# Allegro board TIDC-CC2650-CC2592-EMK_V1.1.0.brd
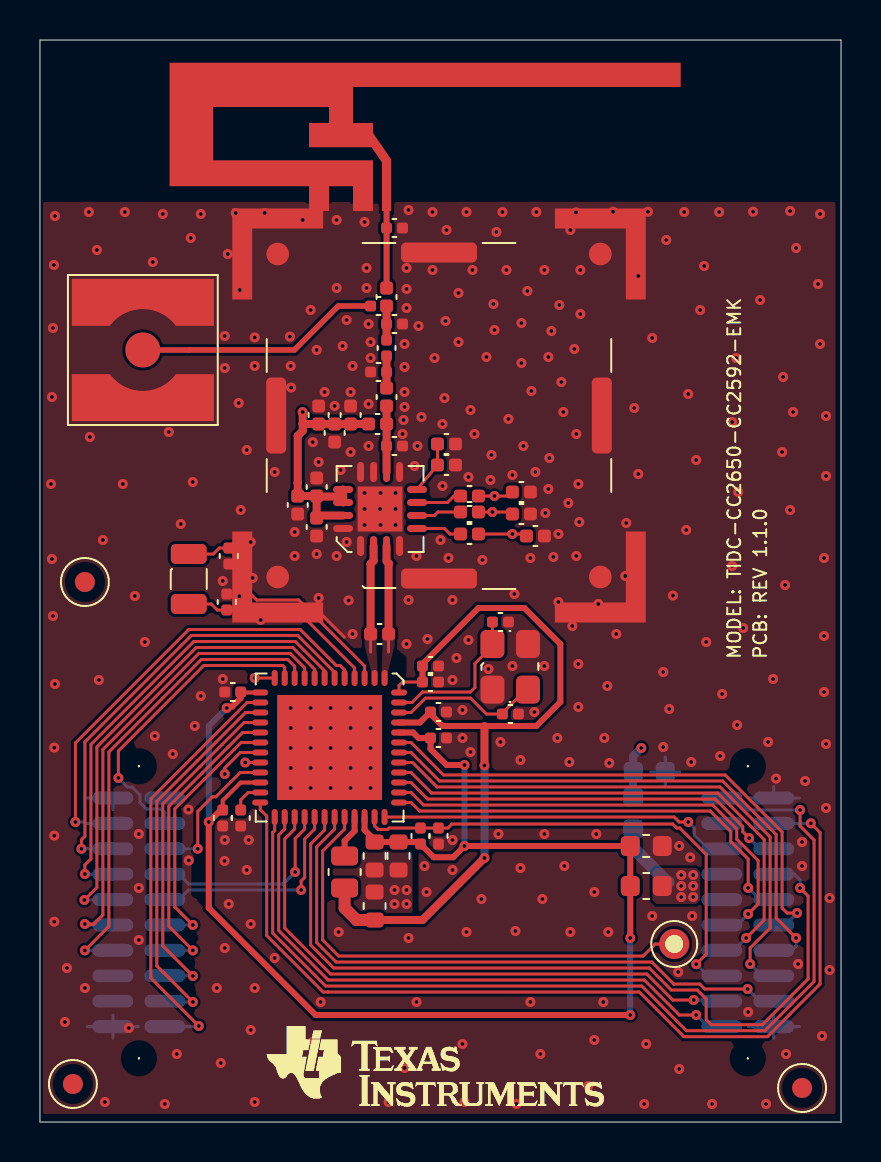
[diagram p0: board, top side]
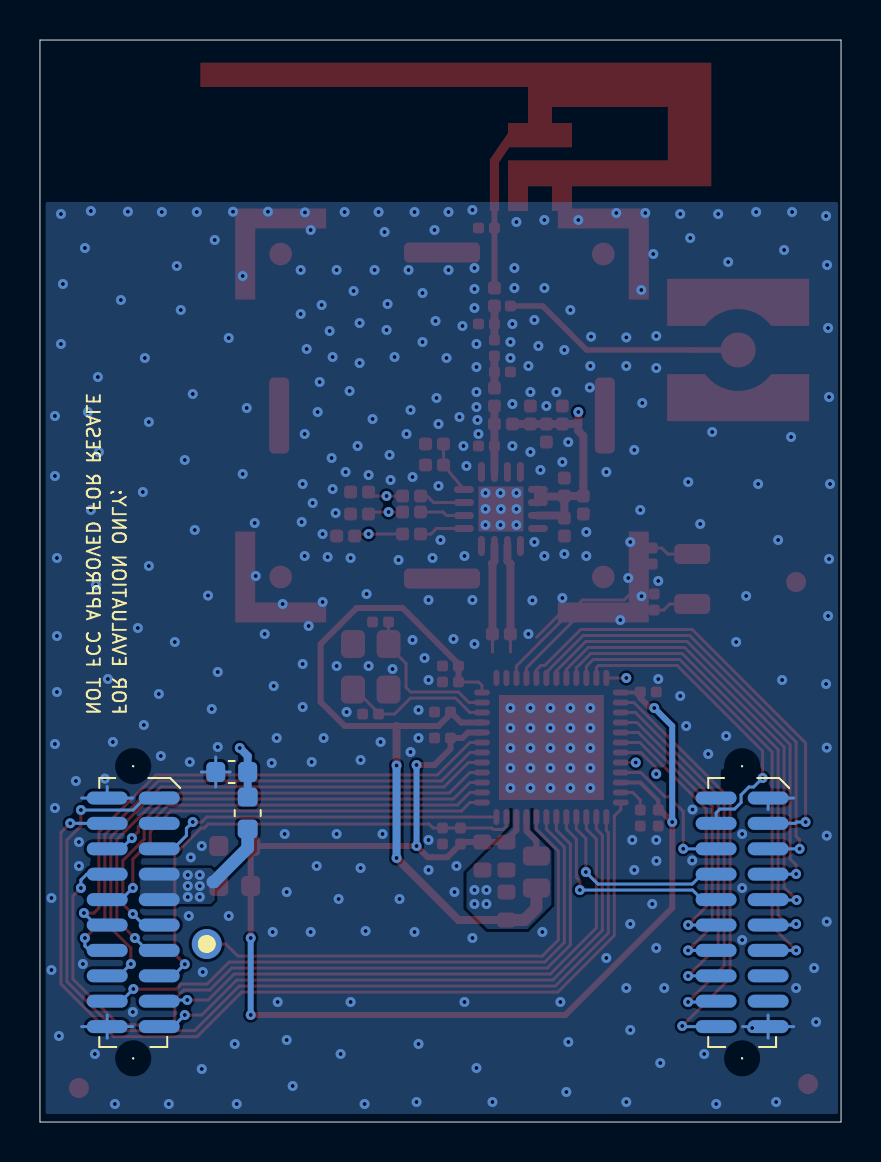
[diagram p1: board, bottom side, seen from below]

Outline 40.1 x 54.1 mm; copper layers: TOP, L2, L3, BOTTOM. Coordinates in mm from the lower left corner of the outline.
Outline path: 0,54.1 0,0 40.1,0 40.1,54.1 0,54.1

## Placement (name value [footprint] x y rotation side)
A1  2.4GHz  [ANTENNA_DN007N]  17.35 45.8 0 top
C1  10uF  [CAPC1608X90N#2]  16.75 10.1 90 top
C2  DNM  [CAPC1608X90N]  29.55 13.8 0 top
C3  100nF  [CAPC1005X60N]  10.05 21.5 180 top
C4  100nF  [CAPC1005X60N]  9.15 15.6 270 top
C5  100nF  [CAPC1005X60N]  19.55 19.2 0 top
C6  10uF  [CAPC1608X90N#2]  16.75 14 270 top
C7  100nF  [CAPC1608X90N#2]  17.95 14 270 top
C8  100nF  [CAPC1005X60N]  19.15 22 0 top
C9  100nF  [CAPC1005X60N]  19.55 20.5 0 top
C10  DNM_0402  [CAPC1005X60N]  19.15 22.8 0 top
C11  2.2uF  [CAPC1608X90N]  29.7 17.5 0 bottom
C12  2.2pF  [CAPC1005X60N]  17.35 33.8 0 top
C13  2.2pF  [CAPC1005X60N]  17.35 37.5 180 top
C14  1pF  [CAPC1005X60N]  17.35 39.9 0 top
C15  DNM_0402  [CAPC1005X60N]  17.35 44.7 0 top
C16  1nF  [CAPC1005X60N#2]  13.85 31.3 90 top
C17  12pF  [CAPC1005X60N]  9.45 28.7 270 top
C18  12pF  [CAPC1005X60N]  9.35 25.6 90 top
C19  12pF  [CAPC1005X60N#2]  13.85 30.2 270 top
C20  100nF  [CAPC1005X60N]  19.95 14.7 270 top
C21  1uF  [CAPC1005X60N#2]  13.95 34.9 90 top
C22  DNM_0402  [CAPC1005X60N]  23.15 20.4 0 top
C23  DNM_0402  [CAPC1005X60N]  22.65 25 0 top
C24  DNM_0402  [CAPC1005X60N]  16.55 40.8 0 top
C25  12pF  [CAPC1005X60N#2]  15.55 34.9 90 top
C26  1nF  [CAPC1005X60N#2]  14.75 34.9 270 top
C27  18pF  [CAPC1005X60N#2]  17.35 40.8 90 top
C28  1uF  [CAPC1005X60N]  10.05 15.6 270 top
C29  DNM_0402  [CAPC1005X60N#2]  19.9 33.9 0 top
C32  DNM_0402  [CAPC1005X60N#2]  12.9 31.3 270 top
C36  1.5pF  [CAPC1005X60N#2]  24.55 31.5 180 top
C37  1.5pF  [CAPC1005X60N#2]  24.55 30.4 180 top
C38  1.5pF  [CAPC1005X60N#2]  25.25 29.3 180 top
DIO22  TP_0.9mm_PTH  [TP150_90H]  31.75 8.9 0 top
FIDU1  FIDU_1MM  [FID100X115B]  1.65 1.9 0 top
FIDU2  FIDU_1MM  [FID100X115B]  38.15 1.7 0 top
FIDU3  FIDU_1MM  [FID100X115B]  2.25 27 0 top
FL1  BLM18HE152SN1  [FIL_BLM18HE152SN1DN]  29.55 11.8 0 top
FL2  BLM18HE152SN1  [FIL_BLM18HE152SN1DN]  29.7 16.25 270 bottom
J1  142-0711-201  [CINCH_1420711201_A2N]  5.15 38.6 90 top
L1  10uH  [INDC2012X150N]  15.25 13.3 270 top
L2  4.7nH  [INDC1005X60N]  16.45 34.9 0 top
L3  TBD  [INDC1005X60N]  17.45 24.4 180 top
L4  1nH  [INDC1005X60N]  17.35 35.8 90 top
L13  2nH  [INDC1005X60N#2]  17.35 38.3 90 top
NOREF  -  []  0 54.1 0 top
NOREF#2  -  []  40.1 0 90 top
P1  SFM-110-02-S-D-A-K-TR  [SAMTEC_SFM11002AN]  3.65 16.2 0 bottom
P2  SFM-110-02-S-D-A-K-TR  [SAMTEC_SFM11002AN]  34.13 16.2 0 bottom
R1  100k  [RESC1005X40N#2]  19.05 14.7 270 top
R2  3.9k  [RESC1005X40N]  20.8 32.85 180 top
R13  10k  [RESC1005X40N]  21.05 29.4 0 top
R14  10k  [RESC1005X40N]  21.05 30.5 0 top
R15  10k  [RESC1005X40N]  21.05 31.3 0 top
SC2  BMIS-202-F  [MECH_BMIS202FN]  11.9 27.25 0 top
U1  CC2650F128RGZ  [QFNFC50P700X700X80-49CN]  17.25 22.2 180 top
U2  CC2592  [QFNFC65P400X400X100-17AN]  16.05 28.8 0 top
UNK#REFDES  -  []  12.35 4.8 0 top
Y1  32.768kHz  [XTAL_FC-135N]  7.45 28.4 270 top
Y2  24MHz  [OSCCC250X320X60-4N]  22.65 23.9 270 top

## Library data of the parts
A1 = ANTENNA_DN007
C1 C2 C6 C7 C11 = CAPACITOR: alternate symbols: (CAPC1608X90L,CAPC1608X90M)
C3-C5 C8-C10 C12-C15 C17 C18 C20 C22-C24 C28 = CAPACITOR: alternate symbols: (CAPC1005X60L,CAPC1005X60M)
C16 C19 C21 C25-C27 C29 C32 C36-C38 = CAPACITOR: User Part Number: #PN; alternate symbols: (CAPC1005X60L,CAPC1005X60M)
DIO22 = TEST_POINT
FIDU1-FIDU3 = FIDMARK
FL1 FL2 = FILTER_2PIN: alternate symbols: (FIL_BLM18HE152SN1DL,FIL_BLM18HE152SN1DM)
J1 = CONN_COAX_1_J_2MH_V1: User Part Number: #PN; alternate symbols: (CINCH_1420711201_A2L,CINCH_1420711201_A2M)
L1 = INDUCTOR: alternate symbols: (INDC2012X150L,INDC2012X150M)
L2 L4 L13 = INDUCTOR: alternate symbols: (INDC1005X60L,INDC1005X60M)
L3 = INDUCTOR: alternate symbols: (INDC1005X60M,INDC1005X60L)
P1 P2 = CONN_HEADER_2X10_P_S: alternate symbols: (SAMTEC_SFM11002AL,SAMTEC_SFM11002AM)
R1 R2 R13-R15 = RESISTOR: alternate symbols: (RESC1005X40L,RESC1005X40M)
SC2 = SHIELD_COVER_BMIS-202: User Part Number: #PN
U1 = IC_RF_CC26XX_QFN48_V2: alternate symbols: (QFNFC50P700X700X80-49CL,QFNFC50P700X700X80-49CM)
U2 = IC_RF_CC2592_QFN16_V1: alternate symbols: (QFNFC65P400X400X100-17AL,QFNFC65P400X400X100-17AM)
Y1 = CRYSTAL: alternate symbols: (XTAL_FC-135L,XTAL_FC-135M)
Y2 = XTAL_4PIN_S: alternate symbols: (OSCCC250X320X60-4L,OSCCC250X320X60-4M)

## Footprints (pads in the part's own frame, mm; a bottom-side part is the same pattern mirrored in y, then rotated)
ANTENNA_DN007N
  rect 0.46x0.5 smd: 1(0,0)
  rect 1x0.5 smd: 2(-1.18,0) 3(-3.38,0)
CAPC1005X60N
  custom 0.55x0.54 smd: 1(0,0) 2(0.8,0)
CAPC1005X60N#2
  custom 0.65x0.64 smd: 1(0,0) 2(0.9,0)
CAPC1608X90N
  custom 0.95x1 smd: 1(0,0) 2(1.6,0)
CAPC1608X90N#2
  custom 0.75x0.9 smd: 1(0,0) 2(1.4,0)
CINCH_1420711201_A2N
  round 1.75 smd: 1(0,0)
  custom 2.35x7.11 smd: M1(-2.38,0) M2(2.38,0)
FID100X115B
  round 1 smd: 1(0,0)
FIL_BLM18HE152SN1DN
  custom 0.95x1 smd: 1(0,0) 2(1.6,0)
INDC1005X60N
  custom 0.65x0.64 smd: 1(0,0) 2(0.9,0)
INDC1005X60N#2
  custom 0.55x0.54 smd: 1(0,0) 2(0.8,0)
INDC2012X150N
  custom 0.95x1.352 smd: 1(0,0) 2(1.6,0)
MECH_BMIS202FN
  custom 4.55x4.55 smd: 1(0,0) 3(16.15,0) 5(16.15,16.15) 7(0,16.15)
  custom 3.8x1 smd: 2(8.075,-0.075) 6(8.075,16.225)
  custom 1x3.8 smd: 4(16.225,8.075) 8(-0.075,8.075)
OSCCC250X320X60-4N
  custom 1.4x1.2 smd: 1(0,0) 2(2.28,0) 3(2.28,1.78) 4(0,1.78)
QFNFC50P700X700X80-49CN
  oval 0.3x0.8 smd: 1(0,0) 2(0.5,0) 3(1,0) 4(1.5,0) 5(2,0) 6(2.5,0) 7(3,0) 8(3.5,0) 9(4,0) 10(4.5,0) 11(5,0) 12(5.5,0) 25(5.5,6.95) 26(5,6.95) 27(4.5,6.95) 28(4,6.95) 29(3.5,6.95) 30(3,6.95) 31(2.5,6.95) 32(2,6.95) 33(1.5,6.95) 34(1,6.95) 35(0.5,6.95) 36(0,6.95)
  oval 0.8x0.3 smd: 13(6.225,0.725) 14(6.225,1.225) 15(6.225,1.725) 16(6.225,2.225) 17(6.225,2.725) 18(6.225,3.225) 19(6.225,3.725) 20(6.225,4.225) 21(6.225,4.725) 22(6.225,5.225) 23(6.225,5.725) 24(6.225,6.225) 37(-0.725,6.225) 38(-0.725,5.725) 39(-0.725,5.225) 40(-0.725,4.725) 41(-0.725,4.225) 42(-0.725,3.725) 43(-0.725,3.225) 44(-0.725,2.725) 45(-0.725,2.225) 46(-0.725,1.725) 47(-0.725,1.225) 48(-0.725,0.725)
  rect 5.25x5.25 smd: 49(2.75,3.475)
QFNFC65P400X400X100-17AN
  oval 0.35x1 smd: 1(0,0) 2(0.65,0) 3(1.3,0) 4(1.95,0) 9(1.95,3.7) 10(1.3,3.7) 11(0.65,3.7) 12(0,3.7)
  oval 1x0.35 smd: 5(2.825,0.875) 6(2.825,1.525) 7(2.825,2.175) 8(2.825,2.825) 13(-0.875,2.825) 14(-0.875,2.175) 15(-0.875,1.525) 16(-0.875,0.875)
  rect 2.25x2.25 smd: 17(0.975,1.85)
RESC1005X40N
  custom 0.65x0.64 smd: 1(0,0) 2(0.9,0)
RESC1005X40N#2
  custom 0.55x0.54 smd: 1(0,0) 2(0.8,0)
SAMTEC_SFM11002AN
  round 0.1 hole 1.5 unplated: (1.302,-1.588) (1.302,13.017)
  oval 2.05x0.65 smd: 1(0,0) 2(2.604,0) 3(0,1.27) 4(2.604,1.27) 5(0,2.54) 6(2.604,2.54) 7(0,3.81) 8(2.604,3.81) 9(0,5.08) 10(2.604,5.08) 11(0,6.35) 12(2.604,6.35) 13(0,7.62) 14(2.604,7.62) 15(0,8.89) 16(2.604,8.89) 17(0,10.16) 18(2.604,10.16) 19(0,11.43) 20(2.604,11.43)
TP150_90H
  round 1.5 hole 0.9: 1(0,0)
XTAL_FC-135N
  custom 1x1.8 smd: 1(0,0) 2(2.5,0)

## Nets
GND: A1.2(GND_2) A1.3(GND_3) C1.2 C2.2 C3.2 C4.2 C5.2 C6.2 C7.2 C8.2 C9.2 C10.2 C11.2 C12.2 C13.2 C14.2 C15.2 C16.2 C17.2 C18.2 C19.2 C20.2 C21.2 C22.2 C23.2 C25.2 C26.2 C28.2 C29.2 C32.2 C36.1 C37.1 C38.1 J1.M1 J1.M2 P1.1 P1.19 P2.2 P2.20 R2.1 SC2.1(GND#1) SC2.2(GND#2) SC2.3(GND#3) SC2.4(GND#4) SC2.5(GND#5) SC2.6(GND#6) SC2.7(GND#7) SC2.8(GND#8) U1.49(VSS) U2.1(GND#1) U2.4(GND#4) U2.9(GND#9) U2.11(GND#11) U2.12(GND#12) U2.16(GND#16) U2.17(EGP/GND) Y2.2 Y2.4
VDD_CC2592: C11.1 C16.1 C19.1 C21.1 C25.1 C26.1 C32.1 FL2.1 L2.1 U2.13(VDD_LNA) U2.14(VDD_BIAS) U2.15(VDD_PA)
VDD_EB: FL1.2 FL2.2 P2.7 P2.9
VDDR: C1.1 C8.1 C9.1 C10.1 L1.2 U1.45(VDDR#45) U1.48(VDDR#48)
VDDS: C2.1 C3.1 C4.1 C5.1 C6.1 C7.1 FL1.1 R1.2 U1.13(VDDS2) U1.22(VDDS3) U1.34(VDDS_DCDC) U1.44(VDDS)
DCDC_SW: L1.1 U1.33(DCDC_SW)
DIO_0: P1.3 U1.5(DIO_0)
DIO_1: P1.5 U1.6(DIO_1)
DIO_2: P1.7 U1.7(DIO_2)
DIO_3: P1.9 U1.8(DIO_3)
DIO_4: P1.11 U1.9(DIO_4)
DIO_5: P1.13 U1.10(DIO_5)
DIO_6: P1.4 U1.11(DIO_6)
DIO_7: C38.2 R13.2 U1.12(DIO_7)
DIO_8: P1.20 U1.14(DIO_8)
DIO_9: P1.18 U1.15(DIO_9)
DIO_10: P1.16 U1.16(DIO_10)
DIO_11: P1.14 U1.17(DIO_11)
DIO_12: P1.12 U1.18(DIO_12)
DIO_13: C37.2 R14.2 U1.19(DIO_13)
DIO_14: C36.2 R15.2 U1.20(DIO_14)
DIO_15: P1.6 U1.21(DIO_15)
DIO_16 / JTAG TDO: P2.19 U1.26(DIO_16)
DIO_17 / JTAG TDI: P2.17 U1.27(DIO_17)
DIO_18: P1.8 U1.28(DIO_18)
DIO_19: P1.10 U1.29(DIO_19)
DIO_20: P2.8 U1.30(DIO_20)
DIO_21: P2.18 U1.31(DIO_21)
DIO_22: DIO22.1 U1.32(DIO_22)
DIO_23: P2.5 U1.36(DIO_23)
DIO_24: P2.10 U1.37(DIO_24)
DIO_25: P2.11 U1.38(DIO_25)
DIO_26: P2.6 U1.39(DIO_26)
DIO_27: P2.13 U1.40(DIO_27)
DIO_28: P2.16 U1.41(DIO_28)
DIO_29: P2.14 U1.42(DIO_29)
DIO_30: P2.12 U1.43(DIO_30)
JTAG_TCK: P2.1 U1.25(JTAG_TCKC)
JTAG_TMS: P2.4 U1.24(JTAG_TMSC)
NRESET: C20.1 P2.15 R1.1 U1.35(RESET_N)
N310466: C23.1 U1.47(X24M_P) Y2.1
N310868: C22.1 U1.46(X24M_N) Y2.3
N314494: L3.1 U1.1(RF_P) U2.3(RF_P)
N314505: L3.2 U1.2(RF_N) U2.2(RF_N)
N314786: C12.1 L2.2 L4.1 U2.10(ANT)
N315193: C13.1 L4.2 L13.1
N316022: A1.1(FEED_1) C15.1 C27.2
N316040: C24.1 J1.1
N316649: C28.1 U1.23(DCOUPL)
N316919: C17.1 U1.3(X32K_Q1) Y1.1
N316932: C18.1 U1.4(X32K_Q2) Y1.2
N334495: C14.1 C24.2 C27.1 L13.2
N435366: R15.1 U2.7(HGM)
N435370: R14.1 U2.6(LNA_EN)
N435374: R13.1 U2.5(PA_EN)
N443687: C29.1 R2.2 U2.8(BIAS)

Pads without a net: FIDU1 1; FIDU2 1; FIDU3 1; P1 2 15 17; P2 3

## Via types
v1: diameter 0.5, hole 0.2, TOP to BOTTOM, 401 vias

## Routing (per net, layer and track width the routed paths; a pad name or vN(x,y) marks a point on that pad's centre or on a via; arc(x,y) is an arc through that point)
GND: length 17.9
  TOP w0.15: v1(13.95,26.2) 13.95,25.53 15.24,24.24
  BOTTOM w0.15: 2.37,16.2 P1.1 3.65,15.62 ; 35.46,4.77 P2.20 ; P2.20 36.73,5.35 ; P2.20 36.73,4.19 ; P2.20 38.01,4.77 ; 2.37,4.77 P1.19 ; P1.19 3.65,4.19 ; P1.19 3.65,5.35 ; P1.19 4.93,4.77 ; 35.46,16.2 P2.2 ; P2.2 38.01,16.2 ; P2.2 36.73,16.78 ; 30.57,17.5 C11.2 ; C11.2 31.3,18.25 ; C11.2 32.03,17.5 ; C11.2 31.3,16.75
  vias: v1(0.55,31.9) v1(0.7,42.85) v1(0.65,39.7) v1(0.6,36.25) v1(0.6,28.15) v1(0.65,25.3) v1(0.75,45.3) v1(0.75,21.9) v1(0.72,18.72) v1(0.72,14.32) v1(0.72,10.02) v1(1.25,5) v1(1.35,7.7) v1(2.25,6.7) v1(2.45,45.5) v1(2.5,34.25) v1(2.85,43.6) v1(2.95,22.1) v1(3.15,29.1) v1(3.25,1) v1(4.15,31.9) v1(4.25,45.5) v1(4.45,4.7) v1(4.75,26.3) v1(4.95,14.4) v1(4.95,11.7) v1(4.95,9.1) v1(5.25,24) v1(5.65,43) v1(5.75,19.3) v1(6.15,45.4) v1(6.25,0.9) v1(6.45,34.5) v1(6.65,18.4) v1(6.85,3.4) v1(7.05,29.9) v1(7.43,15.62) v1(7.45,13.08) v1(7.55,44.2) v1(7.65,32) v1(7.75,19.8) v1(8.05,45.4) v1(8.05,21.3) v1(8.85,6.7) v1(9.05,2.95) v1(9.15,27.05) v1(9.15,22.15) v1(9.25,39.3) v1(9.25,37.7) v1(9.25,14.1) v1(9.24,13.05) v1(9.25,8.7) v1(9.4,43.4) v1(9.45,10.9) v1(9.8,45.45) v1(10,41.6) v1(9.95,35.95) v1(9.99,26.29) v1(10.05,30.6) v1(10.35,33.6) v1(10.35,12.6) v1(10.45,14.1) v1(10.55,29) v1(10.55,9.9) v1(10.55,4.6) v1(10.65,27.2) v1(10.75,39.23) v1(10.75,37.8) v1(10.75,6.7) v1(10.75,1) v1(11.05,25.1) v1(11.25,45.45) v1(11.75,32.5) v1(11.75,8.2) v1(12.51,39.27) v1(12.55,37.8) v1(12.58,36.72) v1(12.55,20.7) v1(12.55,19.7) v1(12.55,18.7) v1(12.55,17.7) v1(12.55,16.7) v1(12.75,29.5) v1(12.75,28.3) v1(13.15,45.1) v1(13.55,40.6) v1(13.55,20.7) v1(13.55,19.7) v1(13.55,18.7) v1(13.55,17.7) v1(13.55,16.7) v1(13.66,33.99) v1(13.65,4) v1(13.75,1.5) v1(13.85,38.6) v1(13.85,28.4) v1(13.95,33) v1(14.05,6) v1(14.25,36.5) v1(14.55,20.7) v1(14.55,19.7) v1(14.55,18.7) v1(14.55,17.7) v1(14.55,16.7) v1(14.75,35.8) v1(14.85,45.1) v1(14.85,41.7) v1(14.85,28.3) v1(14.95,9.5) v1(15.05,32.6) v1(15.15,38.8) v1(15.35,40.1) v1(15.35,29) v1(15.45,26.08) v1(15.55,36.5) v1(15.55,33.5) v1(15.55,20.7) v1(15.55,19.7) v1(15.55,18.7) v1(15.55,17.7) v1(15.55,16.7) v1(15.65,37.8) v1(15.65,24.4) v1(16.25,45) v1(16.25,31.45) v1(16.25,30.65) v1(16.25,29.85) v1(16.35,42.7) v1(16.35,41.7) v1(16.45,39.9) v1(16.45,35.9) v1(16.45,33.8) v1(16.55,39) v1(16.55,38.2) v1(16.55,20.7) v1(16.55,19.7) v1(16.55,18.7) v1(16.55,17.7) v1(16.55,16.7) v1(17.05,31.45) v1(17.03,30.65) v1(17.05,29.85) v1(17.45,1) v1(17.75,11.6) v1(17.75,10.9) v1(17.8,31.45) v1(17.8,30.65) v1(17.8,29.85) v1(18.2,35.1) v1(18.15,34.4) v1(18.25,38.9) v1(18.25,37.75) v1(18.25,36.5) v1(18.25,35.75) v1(18.25,2.7) v1(18.35,42.7) v1(18.35,41.65) v1(18.35,40.7) v1(18.35,23.9) v1(18.35,11.6) v1(18.35,10.9) v1(18.45,45.6) v1(18.45,26.1) v1(18.45,9.2) v1(18.75,32.8) v1(18.9,33.8) v1(18.85,28.3) v1(18.85,6) v1(18.95,39.8) v1(19.1,35.25) v1(19.25,12.8) v1(19.35,11.5) v1(19.4,24.15) v1(19.65,45.5) v1(19.65,42.6) v1(19.75,38.2) v1(20.05,29.1) v1(20.15,34.9) v1(20.15,31.8) v1(20.25,36.2) v1(20.35,44.6) v1(20.3,40.05) v1(20.45,28.2) v1(20.65,26.1) v1(20.65,22.1) v1(20.65,14.1) v1(20.65,12.6) v1(20.85,23.2) v1(20.95,41.45) v1(20.95,39) v1(21.15,20.6) v1(21.15,19.2) v1(21.15,3.9) v1(21.25,1) v1(21.35,45.5) v1(21.35,9.5) v1(21.45,32.25) v1(21.45,24.1) v1(21.55,35.6) v1(21.55,18.5) v1(21.65,42.6) v1(21.75,34.4) v1(22.1,11.15) v1(22.15,28.1) v1(22.35,38.25) v1(22.45,22.65) v1(22.6,33.35) v1(22.55,32.1) v1(22.7,40.9) v1(22.75,39.6) v1(22.85,44.5) v1(22.95,14.4) v1(23.05,19) v1(23.15,45.5) v1(23.35,42.6) v1(23.45,35.15) v1(23.65,32.35) v1(23.65,22.8) v1(23.75,26.4) v1(23.8,9.55) v1(23.85,0.9) v1(24.1,39.95) v1(24.1,37.95) v1(24.05,18.1) v1(24.05,12.7) v1(24.2,33.8) v1(24.4,41.55) v1(24.6,36.55) v1(24.55,28.2) v1(24.55,6) v1(24.75,20.5) v1(24.85,45.5) v1(24.8,32.5) v1(25.05,3.4) v1(25.15,11.15) v1(25.25,42.6) v1(25.25,22.8) v1(25.25,14.4) v1(25.3,30.45) v1(25.45,38.25) v1(25.5,33.2) v1(25.45,31.65) v1(25.6,39.55) v1(25.7,28.25) v1(25.9,19.2) v1(26,40.85) v1(25.95,29.4) v1(25.95,26) v1(26.1,37) v1(26.2,35.5) v1(26.25,12.8) v1(26.45,30.95) v1(26.5,18) v1(26.55,44.6) v1(26.55,9.5) v1(26.65,24.8) v1(26.75,38.65) v1(26.84,45.48) v1(26.85,34.4) v1(26.85,28.3) v1(26.95,31.9) v1(27,30) v1(26.95,22.9) v1(26.95,20.75) v1(27.05,42.6) v1(27.05,40.4) v1(27.45,1.8) v1(27.75,11.5) v1(27.75,4.1) v1(27.85,14.4) v1(27.95,25.9) v1(28.25,19.2) v1(28.2,6) v1(28.4,21.8) v1(28.5,17.95) v1(28.45,9.5) v1(28.69,45.51) v1(28.85,24.4) v1(29.35,29.95) v1(29.3,27.3) v1(29.75,35.7) v1(29.95,42.3) v1(29.95,32.4) v1(30.25,0.9) v1(30.35,3.9) v1(30.44,45.51) v1(30.65,39.2) v1(30.65,10.3) v1(31.2,22.5) v1(31.2,18.75) v1(31.35,44.1) v1(31.5,20.65) v1(31.69,26.32) v1(31.95,7.5) v1(32,2.65) v1(32,13.8) v1(32.25,45.5) v1(32.35,29.6) v1(32.45,36.4) v1(32.6,18) v1(32.55,13.23) v1(32.65,10.3) v1(32.85,33.1) v1(33.05,40.6) v1(33.25,42.8) v1(33.35,24) v1(33.65,0.9) v1(34,45.5) v1(34.05,18.3) v1(34.15,21.4) v1(34.65,35) v1(34.65,27.8) v1(34.85,38.2) v1(34.9,19.85) v1(34.95,31.5) v1(35.2,24.7) v1(35.45,5.5) v1(35.7,45.52) v1(36.05,41.1) v1(36.35,0.9) v1(36.45,19) v1(36.7,22.15) v1(36.85,17.17) v1(37.15,33.5) v1(37.2,37.25) v1(37.3,26.85) v1(37.35,3.4) v1(37.55,45.55) v1(37.55,30.6) v1(37.7,35.5) v1(37.85,43.7) v1(37.95,7.9) v1(38.15,14) v1(38.15,12.8) v1(38.3,17.05) v1(38.95,41.9) v1(39.05,45.4) v1(39.05,38.9) v1(39.15,4.3) v1(39.25,28.2) v1(39.25,24.3) v1(39.25,21.5) v1(39.35,35.3) v1(39.35,32.3) v1(39.35,18.9) v1(39.35,15.7) v1(39.53,11.2) v1(39.53,7.6)
VDD_CC2592: length 48.5
  TOP w0.15: C19.1 13.85,30.43 13.96,30.33 ; C16.1 13.88,31.27
  TOP w0.4: 13.16,34.9 13.15,34.91 v1(13.15,35.5) ; 13.16,34.9 13.16,34.56 12.9,34.3 12.9,31.95 12.9,31.95 C32.1 C16.1 13.85,30.43 ; 13.16,34.9 C21.1 C26.1 C25.1 L2.1 ; 13.88,31.27 15.18,31.27 ; 15.18,31.27 15.18,30.98 ; 15.18,31.27 U2.13 ; U2.15 13.96,30.33
  L3 w0.4: v1(30.1,18.7) 30.1,30.65 27.85,32.9 26.95,32.9 22.75,37.1 13.7,37.1 13.15,36.55 v1(13.15,35.5)
  BOTTOM w0.4: v1(30.1,18.7) 29.7,18.3 C11.1 FL2.1
VDD_EB: length 3.4
  BOTTOM w0.63: 31.45,12 31.4,12 29.7,13.7 FL2.2
  vias: v1(32.1,12.35) v1(32.1,11.8) v1(32.1,11.25) v1(32.7,12.35) v1(32.7,11.8) v1(32.7,11.25)
VDDR: length 39.5
  TOP w0.15: C8.1 18.15,22 17.98,21.83 U1.48
  TOP w0.3: U1.45 19.02,19.98 19.55,20.5 C9.1 19.55,20.4 20.15,19.8 24.85,19.8 26.05,21 26.05,23.9 24.25,25.7 21.95,25.7 19.15,22.9 C10.1 C8.1
  TOP w0.4: v1(22.25,17.83) 22.25,19.8 ; v1(22.25,13.2) 19.15,10.1 C1.1
  TOP w0.6: C1.1 15.85,10.1 15.25,10.7 L1.2
  BOTTOM w0.4: v1(22.25,13.2) v1(22.25,17.83)
VDDS: length 71.1
  TOP w0.2: U1.22 10.05,16.98 9.15,16.08 C4.1 ; C3.1 10.08,21.48 U1.13
  TOP w0.3: U1.44 18.68,19.48 18.95,19.2 C5.1 19.55,18.65 20.35,17.85 v1(21.25,17.85) ; v1(9.35,20.7) 9.42,20.77 9.62,20.77 10.05,21.2 C3.1 ; v1(29.55,9.2) FL1.1 C2.1 v1(21.25,13.8) 20.69,13.24 19.71,13.24 19.05,13.89 R1.2 18.95,14 C7.1 C6.1 16.75,14.1 16.25,14.6 U1.34 ; C4.1 9.05,15.6 v1(8.45,15) 8.45,10.7 13.8,5.35 v1(29.55,5.35)
  BOTTOM w0.3: v1(21.25,13.8) v1(21.25,17.85) ; v1(29.55,9.2) v1(29.55,5.35) ; v1(9.35,20.7) 8.45,19.8 v1(8.45,15)
DCDC_SW: length 2.2
  TOP w0.3: L1.1 15.25,14.05 15.75,14.55 U1.33
DIO_0: length 22.9
  TOP w0.15: U1.5 15.25,22.6 15.03,22.83 14.83,22.83 13.03,24.62 7.45,24.62 1.78,18.95 v1(1.78,15)
  BOTTOM w0.15: v1(1.78,15) 2.23,15 2.3,14.93 P1.3
DIO_1: length 22.7
  TOP w0.15: U1.6 14.75,22.48 12.91,24.33 7.58,24.33 2.25,19 2.25,14.29 2.08,14.11 v1(2.08,13.66)
  BOTTOM w0.15: v1(2.08,13.66) P1.5
DIO_2: length 22.8
  TOP w0.15: v1(2.25,12.4) 2.25,12.85 2.55,13.15 2.55,18.88 7.7,24.03 12.78,24.03 14.25,22.56 U1.7
  BOTTOM w0.15: v1(2.25,12.4) 2.45,12.4 2.46,12.39 P1.7
DIO_3: length 23.2
  TOP w0.15: v1(2.23,11.1) 2.55,11.42 2.85,11.72 2.85,18.75 7.83,23.73 12.66,23.73 13.75,22.63 U1.8
  BOTTOM w0.15: v1(2.23,11.1) 3.63,11.1 P1.9
DIO_4: length 23.7
  TOP w0.15: v1(2.25,9.9) 2.7,9.9 3.15,10.35 3.15,18.62 7.95,23.42 12.53,23.42 13.25,22.71 U1.9
  BOTTOM w0.15: v1(2.25,9.9) 2.45,9.9 2.5,9.85 P1.11
DIO_5: length 23.8
  TOP w0.15: v1(2.25,8.58) 3.45,9.78 3.45,18.5 8.08,23.12 12.41,23.12 12.75,22.78 U1.10
  BOTTOM w0.15: P1.13 v1(2.25,8.58)
DIO_6: length 15.8
  TOP w0.15: U1.11 12.25,22.73 12.15,22.83 8.2,22.83 3.93,18.55 v1(3.93,17.2)
  BOTTOM w0.15: v1(3.93,17.2) 4.38,16.75 4.61,16.75 5,16.36 5,15.97 5.33,15.65 6.06,15.65 6.25,15.46 P1.4
DIO_7: length 20.9
  TOP w0.15: R13.2 v1(23.65,29.4) 24.25,29.4 C38.2 ; U1.12 v1(10.75,22.2)
  L3 w0.15: v1(23.65,29.4) 23.65,28.95 23.55,28.85 23.55,27.1 21.45,25 13.05,25 10.75,22.7 v1(10.75,22.2)
DIO_8: length 21.5
  TOP w0.15: v1(7.95,4.8) 5.55,7.2 5.55,16.16 10.37,20.98 U1.14
  BOTTOM w0.15: P1.20 7.92,4.77 v1(7.95,4.8)
DIO_9: length 19.2
  TOP w0.15: U1.15 10.29,20.48 8.82,19 8.82,19 7.88,18.06 5.85,16.03 5.85,7.81 v1(7.66,6)
  BOTTOM w0.15: v1(7.66,6) 6.29,6 P1.18
DIO_10: length 17.2
  TOP w0.15: U1.16 10.22,19.98 9.12,18.88 9.12,18.88 8,17.76 8,17.76 6.15,15.91 6.15,8.81 v1(7.66,7.3)
  BOTTOM w0.15: v1(7.66,7.3) 7.49,7.3 7.48,7.31 P1.16
DIO_11: length 15.2
  TOP w0.15: U1.17 10.14,19.48 9.42,18.75 8.13,17.46 8.13,17.46 6.45,15.78 6.45,9.79 v1(7.66,8.58)
  BOTTOM w0.15: v1(7.66,8.58) P1.14
DIO_12: length 13.2
  TOP w0.15: U1.18 10.07,18.98 9.72,18.63 6.75,15.66 6.75,10.76 v1(7.66,9.85)
  BOTTOM w0.15: v1(7.66,9.85) P1.12
DIO_13: length 27.9
  TOP w0.15: U1.19 10.03,18.48 9.25,17.7 v1(9.25,17.4) ; R14.2 v1(22.65,30.5) 23.55,30.5 C37.2
  L3 w0.15: v1(9.25,17.4) 9.25,19.45 9.97,20.17 9.98,22.78 9.98,22.78 9.98,23.06 12.52,25.61 21.21,25.61 22.65,27.05 v1(22.65,30.5)
DIO_14: length 26.5
  TOP w0.15: R15.2 v1(22.75,31.3) 23.45,31.3 C36.2 ; U1.20 v1(10.28,17.98)
  L3 w0.15: v1(10.28,17.98) 10.28,22.65 10.28,22.66 10.28,22.83 12.75,25.3 21.33,25.3 23.15,27.12 23.15,31.15 23,31.3 v1(22.75,31.3)
DIO_15: length 7.4
  TOP w0.15: v1(7.9,13.66) 7.9,15.53 8.63,16.26 8.81,16.26 10.03,17.48 U1.21
  BOTTOM w0.15: P1.6 v1(7.9,13.66)
DIO_16 / JTAG TDO: length 30
  TOP w0.15: v1(32.85,5.35) 32,5.35 30.25,7.1 14.42,7.1 11.95,9.57 11.95,14.35 12.25,14.65 U1.26
  BOTTOM w0.15: P2.19 33.43,4.77 v1(32.85,5.35)
DIO_17 / JTAG TDI: length 29.2
  TOP w0.15: U1.27 12.75,14.65 12.25,14.15 12.25,9.7 14.55,7.4 30.38,7.4 31.68,6.1 v1(32.73,6.1)
  BOTTOM w0.15: v1(32.73,6.1) 33.37,6.1 33.43,6.04 P2.17
DIO_18: length 9.9
  TOP w0.15: v1(12.78,12.5) 12.78,14.17 13.25,14.65 U1.28
  BOTTOM w0.15: P1.8 6.95,12.39 7.44,11.9 12.18,11.9 v1(12.78,12.5)
DIO_19: length 10.9
  TOP w0.15: U1.29 13.75,14.65 13.25,14.15 13.25,12.23 13.08,12.05 v1(13.08,11.6)
  BOTTOM w0.15: P1.10 6.95,11.12 7.43,11.6 v1(13.08,11.6)
DIO_20: length 41.3
  TOP w0.15: U1.30 14.25,14.6 13.55,13.9 13.55,8.85 14.7,7.7 30.5,7.7 31.6,6.6 32.9,6.6 33.35,6.15 33.35,5.12 33.6,4.87 36.17,4.87 38.45,7.15 38.45,11.3 v1(38.05,11.7)
  BOTTOM w0.15: P2.8 37.76,12.39 38.05,12.1 v1(38.05,11.7)
DIO_21: length 30.7
  TOP w0.15: U1.31 14.75,14.65 13.85,13.75 13.85,8.98 14.83,8 30.62,8 31.72,6.9 33.03,6.9 33.28,6.65 v1(35.42,6.65)
  BOTTOM w0.15: P2.18 36.03,6.04 v1(35.42,6.65)
DIO_22: length 24.8
  TOP w0.15: DIO22.1 30.8,8.9 30.2,8.3 14.95,8.3 14.15,9.1 14.15,13.55 15.25,14.65 U1.32
DIO_23: length 17.7
  TOP w0.15: U1.36 31.75,15.25 32,15 v1(32.45,15)
  BOTTOM w0.15: v1(32.45,15) 32.77,14.68 32.77,14.32 33.43,13.66 P2.5
DIO_24: length 21.9
  TOP w0.15: v1(35.45,11.7) 35.45,13.15 34.58,14.02 34.58,14.52 33.55,15.55 19,15.55 18.58,15.98 U1.37
  BOTTOM w0.15: P2.10 36.03,11.12 v1(35.45,11.7)
DIO_25: length 24.1
  TOP w0.15: v1(35.45,10.4) 35.95,10.9 35.95,13.07 34.88,14.14 34.88,14.64 33.68,15.85 19.2,15.85 18.58,16.48 U1.38
  BOTTOM w0.15: v1(35.45,10.4) 34.9,9.85 P2.11
DIO_26: length 20.3
  TOP w0.15: v1(35.5,14.19) 35.18,14.51 35.18,14.77 33.8,16.15 19.4,16.15 18.58,16.98 U1.39
  BOTTOM w0.15: P2.6 36.03,13.66 v1(35.5,14.19)
DIO_27: length 26.4
  TOP w0.15: v1(35.35,9.2) 36.25,10.1 36.25,14.12 33.93,16.45 19.6,16.45 18.58,17.48 U1.40
  BOTTOM w0.15: v1(35.35,9.2) 34.73,8.58 P2.13
DIO_28: length 28.3
  TOP w0.15: v1(35.55,7.9) 35.55,8.7 36.55,9.7 36.55,14.25 34.05,16.75 19.88,16.75 18.65,17.98 U1.41
  BOTTOM w0.15: P2.16 36.72,7.3 36.15,7.3 v1(35.55,7.9)
DIO_29: length 27.8
  TOP w0.15: v1(37.85,9.2) 36.85,10.2 36.85,14.38 34.17,17.05 20,17.05 18.58,18.48 U1.42
  BOTTOM w0.15: P2.14 37.63,8.58 37.85,8.8 v1(37.85,9.2)
DIO_30: length 27.1
  TOP w0.15: v1(37.9,10.45) 37.4,10.45 37.15,10.7 37.15,14.5 34.3,17.35 20.2,17.35 18.58,18.98 U1.43
  BOTTOM w0.15: v1(37.9,10.45) 37.3,9.85 P2.12
JTAG_TCK: length 49
  TOP w0.15: U1.25 11.75,14.57 11.65,14.47 11.65,9.45 14.3,6.8 30.12,6.8 32.36,4.57 36.29,4.57 38.75,7.03 38.75,14.1 38.05,14.8 v1(38.05,15.6)
  BOTTOM w0.15: P2.1 34.83,16.2 35.43,15.6 v1(38.05,15.6)
JTAG_TMS: length 47.8
  TOP w0.15: U1.24 11.03,15.62 11.35,15.3 11.35,9.32 14.18,6.5 14.42,6.5 14.42,6.5 30,6.5 32.23,4.27 36.42,4.27 39.05,6.9 39.05,14.47 v1(38.59,14.94)
  BOTTOM w0.15: v1(38.59,14.94) 38.13,14.94 38.13,14.93 P2.4
NRESET: length 25.1
  TOP w0.15: v1(32.85,7.89) 33.35,8.39 33.35,13.38 32.03,14.7 31.87,14.7 31.67,14.9 20.62,14.9 20.42,14.7 C20.1 R1.1 17.48,14.7 17.41,14.62 16.93,14.62 16.75,14.8 U1.35
  BOTTOM w0.15: v1(32.85,7.89) 33.43,7.31 P2.15
N310466: length 7.7
  TOP w0.15: C23.1 Y2.1 22.65,23.8 21.78,22.92 21.78,21.73 21.55,21.5 19.15,21.5 18.62,20.98 U1.47
N310868: length 7.6
  TOP w0.15: C22.1 23.15,20.45 ; 23.15,20.45 23.1,20.4 22.35,20.4 21.55,21.2 19.3,21.2 18.58,20.48 U1.46 ; 23.15,20.45 24.32,21.62 Y2.3
N314494: length 5.4
  TOP w0.15: L3.1 17.45,23.5
  TOP w0.4: U2.3 17.35,28.04 17.47,27.93 17.46,27.91 17.45,27.9 L3.1
N314505: length 5.4
  TOP w0.15: L3.2 16.55,23.5
  TOP w0.4: L3.2 16.55,27.91 16.55,27.91 16.7,28.06 U2.2
N314786: length 3.3
  TOP w0.4: L4.1 L2.2 C12.1 U2.10
N315193: length 1.6
  TOP w0.4: L4.2 C13.1 L13.1
N316022: length 4.1
  TOP w0.3: A1.1 C15.1 C27.2
N316040: length 12.3
  TOP w0.28: C24.1 14.93,40.8 12.73,38.6 7.46,38.6 7.45,38.6 J1.1
N316649: length 1.6
  TOP w0.15: C28.1 10.05,16.1 10.42,16.48 U1.23
N316919: length 12.7
  TOP w0.15: Y1.1 8.68,28.4 8.98,28.7 C17.1 9.45,28.7 9.95,28.2 9.95,27.01 10.85,26.1 12.95,26.1 16.25,22.8 U1.3
N316932: length 10.1
  TOP w0.15: U1.4 15.75,22.7 12.85,25.6 C18.1 8.88,25.6 8.58,25.9 Y1.2
N334495: length 1.7
  TOP w0.4: C24.2 C14.1 L13.2
N435366: length 2.3
  TOP w0.15: 18.88,30.98 20.4,30.98 20.72,31.3 R15.1
N435370: length 2.2
  TOP w0.15: 18.88,30.33 19.75,30.33 19.92,30.5 R14.1
N435374: length 2.3
  TOP w0.15: R13.1 20.52,29.4 20.25,29.67 18.88,29.67
N443687: length 2.6
  TOP w0.15: C29.1 R2.2 18.88,31.62

## Copper pours and planes (outline as drawn; the poured copper is in the pictures)
GND on TOP: 0.15,0.4 0.15,46 39.82,46 39.82,0.4 ; 11 cut-outs
GND on BOTTOM: 0.15,0.4 0.15,46 39.82,46 39.82,0.4 ; 9 cut-outs
GND on L2: 0.15,0.4 0.15,46 39.82,46 39.82,0.4 ; 1 cut-out
GND on L3: 0.15,0.4 0.15,46 39.82,46 39.82,0.4 ; 2 cut-outs
VDD_EB on TOP: 30.85,12.7 32.85,12.7 33.05,12.5 33.05,11.1 32.85,10.9 30.85,10.9 30.65,11.1 30.65,12.5
VDD_EB on BOTTOM: 31.55,12.7 34.85,12.7 35.1,12.45 35.1,11.05 34.95,10.9 31.55,10.9 31.35,11.1 31.35,12.5
Net_1 on TOP (solid shape): 32.07,51.75 15.67,51.75 15.67,49.95 16.67,49.95 16.67,49.45 17.58,48.13 17.58,46.05 17.12,46.05 17.12,47.98 16.6,48.74 13.47,48.74 13.47,49.95 14.47,49.95 14.47,50.75 8.67,50.75 8.67,48.08 16.67,48.08 16.67,46.05 15.67,46.05 15.67,46.79 14.47,46.79 14.47,46.05 13.47,46.05 13.47,46.79 6.49,46.79 6.49,52.96 32.07,52.96
N314494 on TOP: 17.75,24.2 17.75,23.8 17.4,22.45 17.4,22 17.1,22 17.1,22.45 17.15,23.8 17.15,24.2
N314505 on TOP: 16.25,24.2 16.25,23.8 16.6,22.45 16.6,22 16.9,22 16.9,22.45 16.85,23.7 16.85,24.2

## Text on the board
Ref Des/Silkscreen Bottom: FOR EVALUATION ONLY; | NOT FCC APPROVED FOR RESALE
Ref Des/Silkscreen Top: MODEL: TIDC-CC2650-CC2592-EMK | PCB: REV 1.1.0
XSECTION_CHART: *  SURFACE - AIR 0 MM | L1: TOP CONDUCTOR - COPPER 0.035 MM | *  DIELECTRIC - FR-4 0.175 MM | L2: L2 CONDUCTOR - COPPER 0.018 MM | *  DIELECTRIC - FR-4 1.14 MM | L3: L3 CONDUCTOR - COPPER 0.018 MM | L4: BOTTOM CONDUCTOR - COPPER 0.035 MM | DESIGN CROSS SECTION CHART | ___________________________ | TOTAL THICKNESS 1.596 MM
NCLEGEND-1-4: FIGURE | SIZE | 0.2 | 0.9 | 1.5 | DRILL CHART: TOP to BOTTOM | ALL UNITS ARE IN MILLIMETERS | PLATED | NON-PLATED | QTY | 367 | 34 | 1 | 4
